# Altium PCB PCB1.PcbDoc
Units mm, origin at the board's own origin, x right, y up, seen from the top; angles counter-clockwise.
Board outline 168.4 x 154.15 mm, 2 copper layers (Top Layer, Bottom Layer); 101 components, 128 nets, 486 pads, 0 vias.
Unrouted connection lines stored in the file: 15.
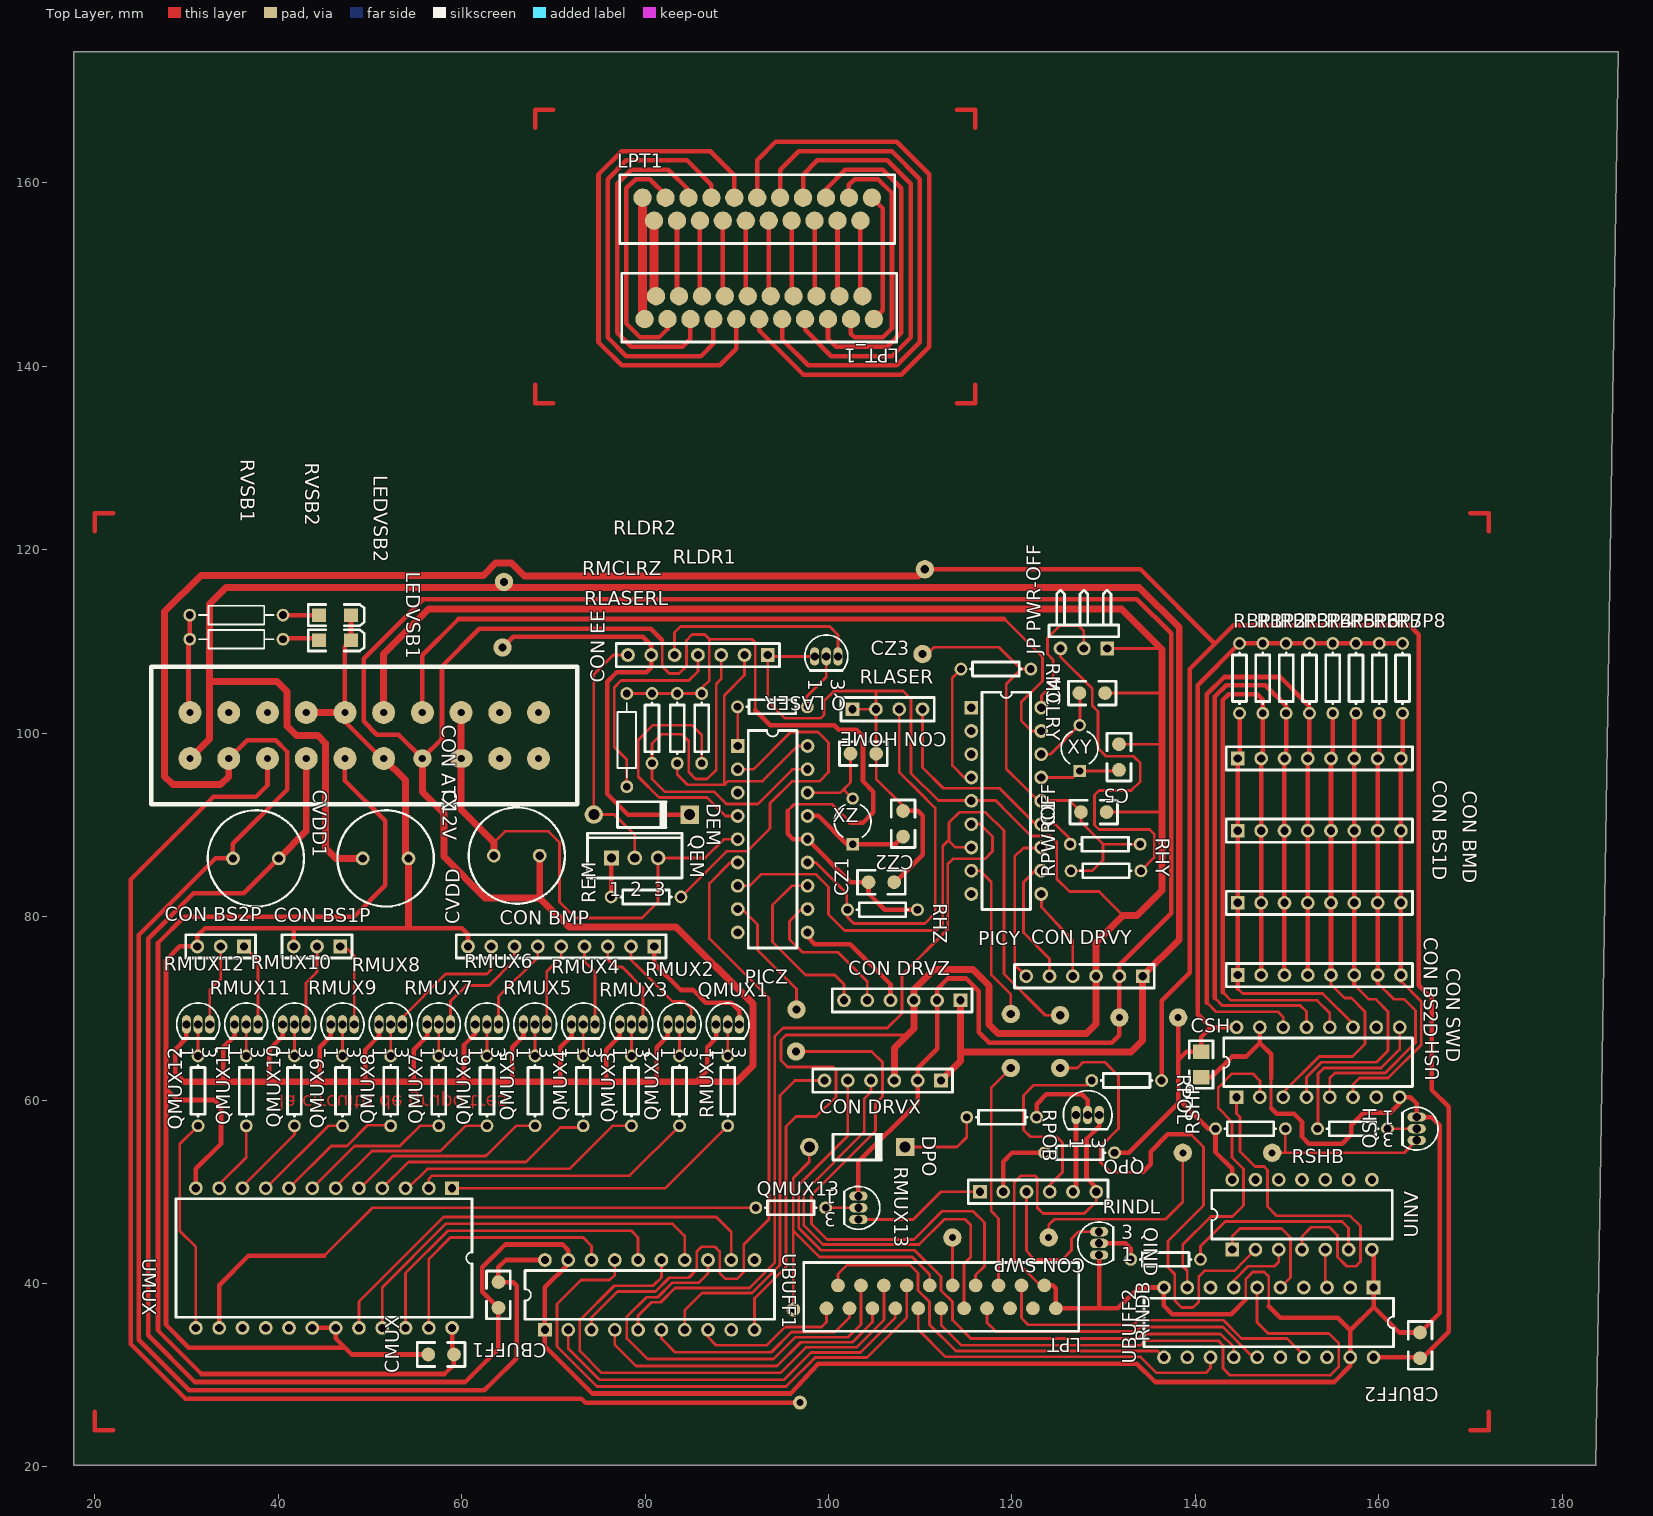
[diagram p0: Top Layer view]
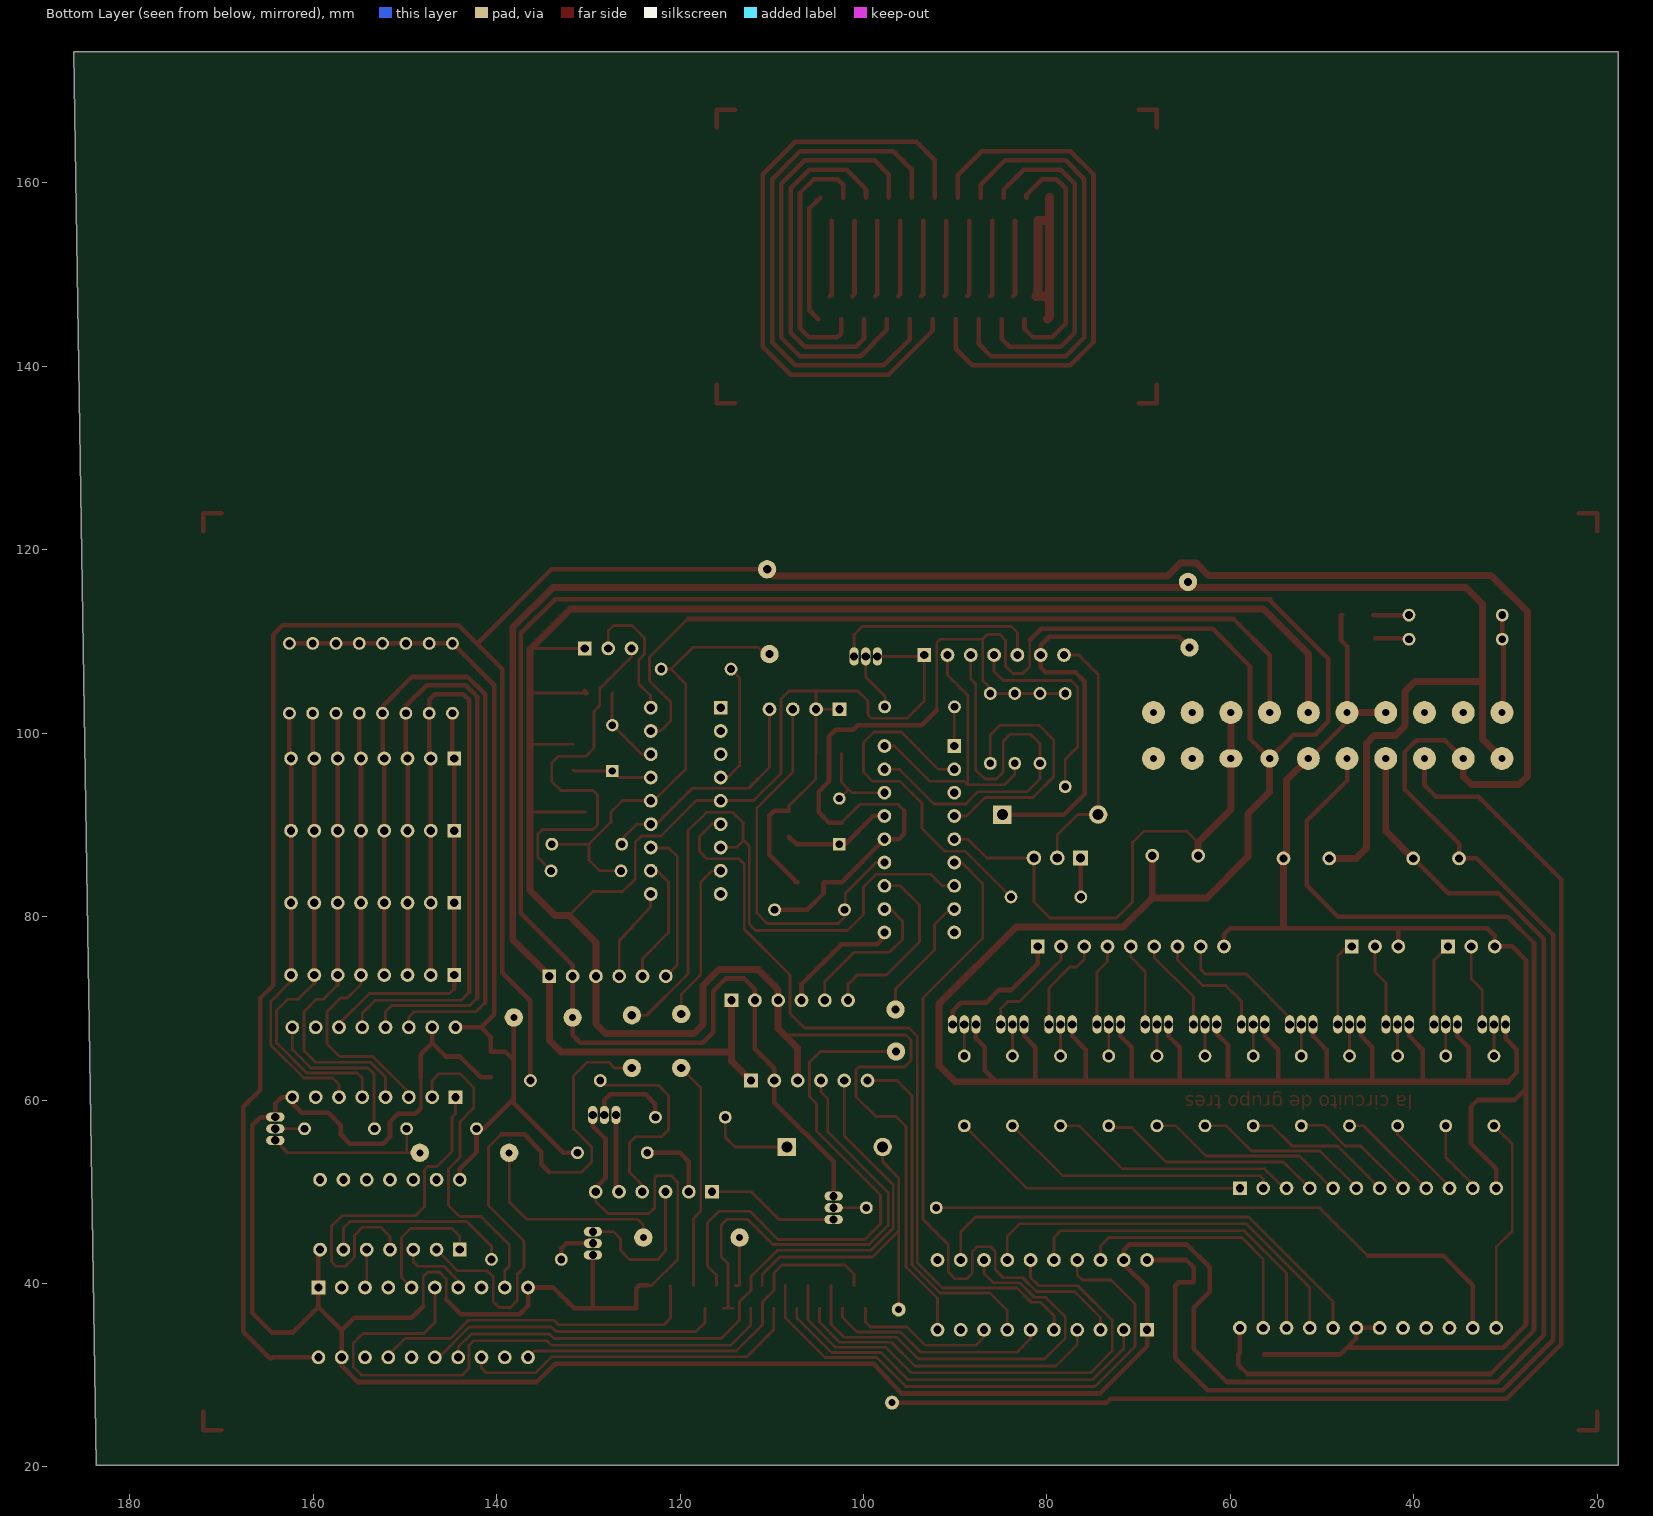
[diagram p1: Bottom Layer view, seen from below]

## Layer stack, top to bottom
Top Layer: signal copper 0.0356
Dielectric: dielectric 0.32, FR-4, Dk 4.8
Bottom Layer: signal copper 0.0356

## Board outline
186.1,174.3 17.7,174.3 17.7,20.15 183.65,20.15

## Design rules (kind name [scope] priority, off if disabled: settings)
Clearance [All] p1: gap=0.254
ComponentClearance [All] p1: gap=0.254 collisioncheckmode=0
PolygonConnect [All] p1: connectstyle=Relief reliefconductorwidth=0.254 reliefentries=4 polygonreliefangle="90 Angle"
RoomDefinition MAIN2 [InComponentClass('MAIN2')] p1: confinementstyle=ConfineIn formatcopy=TRUE outline 0,0 50.8,0 50.8,25.4 0,25.4
RoutingLayers [All] p1: top layer=Any bottom layer="Not Used"
RoutingVias [All] p1: holewidth=0.711 width=1.27 viastyle="Through Hole" minholewidth=0.711 minwidth=1.27 maxholewidth=0.711 maxwidth=1.27
SolderMaskExpansion [All] p1: expansion=0.102
TestPointUsage [All] p1: valid=0 allowmultiple=FALSE
Testpoint [All] p1: side=15 testpointundercomponent=TRUE minsize=1.016 maxsize=2.54 preferedsize=1.524 minholesize=0 maxholesize=1.016 preferedholesize=0.813 testpointgrid=0.025 style=1023 order=1234567890
Width [All] p1: maxlimit=10 minlimit=0.254 preferedwidth=0.254 toplayer_prefwidth=0.5 bottomlayer_maxwidth=0.254 minimp=50.000000 maximp=50.000000 favimp=50.000000
16 further rules are at their usual default settings.

## Components (designator, comment, footprint, x,y, rotation, side; value= is the part's Value field where it differs from the comment)
C1 "" C3216-1206#1 128.915,91.4 r180 top
C4 "XTAL" C3216-1206#1 128.75,104.375 r180 top
C5 "XTAL" C3216-1206#1 131.665,97.4 r270 top
C12V "" RB5-10.5 51.7,86.35 r0 top
CBUFF1 "" C3216-1206#1 64,38.75 r270 top (schematic designator CMUX)
CBUFF2 "" C3216-1206#1 164.5,33.25 r270 top (schematic designator CMUX)
CMUX "" C3216-1206#1 57.75,32.25 r180 top
"CON ATX" "ATX CONNECTOR" ATX 30.375,97.25 r0 top
"CON BMD" "HDR1X8" HDR1X8 144.63,97.25 r0 top
"CON BMP" "HDR1X9" HDR1X9 81,76.75 r180 top
"CON BS1D" "HDR1X8" HDR1X8 144.63,89.375 r0 top
"CON BS1P" "HDR1X3" HDR1X3 46.75,76.75 r180 top
"CON BS2D" "HDR1X8" HDR1X8 144.63,81.5 r0 top
"CON BS2P" "HDR1X3" HDR1X3 36.25,76.75 r180 top
"CON DRVX" "HDR1X6" HDR1X6 112.25,62.125 r180 top
"CON DRVY" "HDR1X6" HDR1X6 134.25,73.5 r180 top
"CON DRVZ" "HDR1X6" HDR1X6 114.375,70.875 r180 top
"CON EE" "HDR1X7" HDR1X7 93.37,108.525 r180 top
"CON HOME" "HDR1X4" HDR1X4 102.62,102.615 r0 top
"CON SWD" "HDR1X8" HDR1X8 144.63,73.625 r0 top
"CON SWP" "HDR1X6" HDR1X6 116.5,50 r0 top
CSH "" C3216-1206#2 140.63,63.875 r90 top
CVDD "" RB5-10.5 66,86.65 r180 top
CVDD1 "" RB5-10.5 37.55,86.35 r0 top (schematic designator CVDD)
CZ1 "" C3216-1206#1 105.75,83.75 r180 top
CZ2 "XTAL" C3216-1206#1 108.125,90.125 r270 top
CZ3 "XTAL" C3216-1206#1 103.79,97.775 r180 top
DEM "1N4001" DIO10.46-5.3x2.8 79.625,91.125 r0 top
DPO "1N4001" DIO10.46-5.3x2.8 103.125,54.875 r0 top
"JP PWR-OFF" "AUTO PWR-OFF" HDR1X3H 130.375,109.25 r180 top
LEDVSB1 "" DSO-F2/D6.1 46.175,112.875 r0 top
LEDVSB2 "" DSO-F2/D6.1 46.175,110.125 r0 top
LPT "Connector 36" PCBComponent_1#1 109.78,37.286 r180 top
LPT1 "Connector 36" PCBComponent_1#2 94.72,158.394 r0 top
LPT_1 "Connector 36" PCBComponent_1#2 89.938,145.154 r180 top
PICY "PIC16C84-04/P" DIP-18 119.375,92.625 r270 top
PICZ "PIC16C84-04/P" DIP-18 93.902,88.439 r270 top
"Q LASER" "2N3904" BCY-W3/D4.7 99.75,108.375 r270 top
QEM "TIP122" SFM-T3/X1.6V 78.87,86.4 r0 top
QIND "2N3904" BCY-W3/D4.7 129.5,44.375 r0 top
QMUX1 "2N3906" BCY-W3/D4.7 89,68.25 r270 top
QMUX2 "2N3906" BCY-W3/D4.7 83.75,68.25 r270 top
QMUX3 "2N3906" BCY-W3/D4.7 78.5,68.25 r270 top
QMUX4 "2N3906" BCY-W3/D4.7 73.25,68.25 r270 top
QMUX5 "2N3906" BCY-W3/D4.7 68,68.25 r270 top
QMUX6 "2N3906" BCY-W3/D4.7 62.75,68.25 r270 top
QMUX7 "2N3906" BCY-W3/D4.7 57.5,68.25 r270 top
QMUX8 "2N3906" BCY-W3/D4.7 52.25,68.25 r270 top
QMUX9 "2N3906" BCY-W3/D4.7 47,68.25 r270 top
QMUX10 "2N3906" BCY-W3/D4.7 41.75,68.25 r270 top
QMUX11 "2N3906" BCY-W3/D4.7 36.5,68.25 r270 top
QMUX12 "2N3906" BCY-W3/D4.7 31.25,68.25 r270 top
QMUX13 "2N3906" BCY-W3/D4.7 103.25,48.25 r180 top
QPO "2N3904" BCY-W3 128.25,58.375 r270 top
QSH "2N3904" BCY-W3/D4.7 164.13,56.875 r180 top
RBP1 "Res1" AXIAL-0.3 144.814,105.985 r90 top
RBP2 "Res1" AXIAL-0.3 147.354,105.985 r90 top
RBP3 "Res1" AXIAL-0.3 149.894,105.985 r90 top
RBP4 "Res1" AXIAL-0.3 152.434,105.985 r90 top
RBP5 "Res1" AXIAL-0.3 154.974,105.985 r90 top
RBP6 "Res1" AXIAL-0.3 157.514,105.985 r90 top
RBP7 "Res1" AXIAL-0.3 160.054,105.985 r90 top
RBP8 "Res1" AXIAL-0.3 162.594,105.985 r90 top
REM "" AXIAL-0.3 80.1,82.15 r180 top
RHY "" AXIAL-0.3 130.165,87.9 r0 top
RHZ "" AXIAL-0.3 105.875,80.75 r0 top
RINDB "" AXIAL-0.3 136.75,42.625 r180 top
RINDL "" AXIAL-0.3 127.375,54.25 r0 top
RLASER "" AXIAL-0.3 93.875,102.875 r0 top
RLASERL "" AXIAL-0.4 78,99.25 r90 top
RLDR1 "" AXIAL-0.3 83.495,100.525 r90 top
RLDR2 "" AXIAL-0.3 80.745,100.525 r90 top
RMCLRY "" AXIAL-0.3 118.245,106.99 r0 top
RMCLRZ "" AXIAL-0.3 86.165,100.525 r90 top
RMUX1 "" AXIAL-0.3 89,61 r90 top
RMUX2 "" AXIAL-0.3 83.75,61 r90 top
RMUX3 "" AXIAL-0.3 78.5,61 r90 top
RMUX4 "" AXIAL-0.3 73.25,61 r90 top
RMUX5 "" AXIAL-0.3 68,61 r90 top
RMUX6 "" AXIAL-0.3 62.75,61 r90 top
RMUX7 "" AXIAL-0.3 57.5,61 r90 top
RMUX8 "" AXIAL-0.3 52.25,61 r90 top
RMUX9 "" AXIAL-0.3 47,61 r90 top
RMUX10 "" AXIAL-0.3 41.75,61 r90 top
RMUX11 "" AXIAL-0.3 36.5,61 r90 top
RMUX12 "" AXIAL-0.3 31.25,61 r90 top
RMUX13 "" AXIAL-0.3 95.875,48.25 r0 top
RPOB "" AXIAL-0.3 118.875,58.125 r0 top
RPOL "" AXIAL-0.3 132.5,62.125 r0 top
RPWROFF "" AXIAL-0.3 130.245,84.99 r180 top
RSHB "" AXIAL-0.3 157.13,56.875 r180 top
RSHP "" AXIAL-0.3 146,56.875 r180 top
RVSB1 "" AXIAL-0.4 35.425,112.875 r0 top
RVSB2 "" AXIAL-0.4 35.425,110.25 r0 top
UBUFF1 "SN74LS244N" DIP-20/E5.3 80.5,38.75 r0 top
UBUFF2 "SN74LS244N" DIP-20/E5.3 148,35.75 r180 top
UINV "SN74LS04N" DIP-14/D19.7 151.625,47.5 r0 top
UMUX "DM74LS154N" DIP-24/D32.3 44.978,42.774 r180 top
USH "DM74LS165J" DIP-16 153.38,64.125 r0 top
XY "11.059MHz" CAPR5-4X5 127.375,95.875 r90 top
XZ "11.059MHz" CAPR5-4X5 102.625,87.875 r90 top

## Footprints (in the part's own frame and the unit in brackets; to place one, negate y for a bottom-side part, rotate by r counter-clockwise, add the part's x,y. Pads: shape width x height; smd on the part's side, far side on the other; paste and mask are expansions set on the pad)
ATX [mm]
  round 2.5 hole 0.8: 1(38,0) 2(33.778,0) 5(21.111,0) 6(16.889,0) 7(12.667,0) 8(8.444,0) 9(4.222,0) 10(0,0) 11(38,5) 12(33.778,5) 13(29.555,5) 14(25.333,5) 15(21.111,5) 16(16.889,5) 17(12.667,5) 18(8.444,5) 19(4.222,5) 20(0,5)
  oval 2.5x2 hole 0.8: 3(29.555,0)
  round 2 hole 0.8: 4(25.333,0)
  silkscreen extent -4.22,-5 42.22,10
AXIAL-0.3 [mm]
  round 1.4 hole 0.85: 1(-3.81,0) 2(3.81,0)
  silkscreen extent -2.77,-0.76 2.77,0.76
AXIAL-0.4 [mm]
  round 1.4 hole 0.85: 1(-5.08,0) 2(5.08,0)
  silkscreen extent -4.06,-1.02 4.06,1.02
BCY-W3 [mm]
  oval 2x1 hole 0.9: 1(0,-1.27) 2(0,0) 3(0,1.27)
  silkscreen extent -2.65,-2.65 1.55,2.65
BCY-W3/D4.7 [mm]
  oval 2x1 hole 0.9: 1(0,-1.27) 2(0,0) 3(0,1.27)
  silkscreen extent -2.33,-2.33 1.55,2.33
C3216-1206#1 [mm]
  round 1.5 smd: 1(-1.4,0) 2(1.4,0)
  silkscreen extent -2.6,-1.3 2.6,1.3
C3216-1206#2 [mm]
  rect 1.6x1.8 smd: 1(-1.4,0) 2(1.4,0)
  silkscreen extent -2.6,-1.3 2.6,1.3
CAPR5-4X5 [mm]
  rect 1.35x1.35 hole 0.8: 1(0,0)
  round 1.35 hole 0.8: 2(5,0)
  silkscreen extent 0.81,-2 4.32,2
DIO10.46-5.3x2.8 [mm]
  round 2 hole 1.2: 1(-5.23,0)
  rect 2x2 hole 1.2: 2(5.23,0)
  silkscreen extent -2.65,-1.4 2.75,1.4
DIP-14/D19.7 [mm]
  rect 1.5x1.5 hole 0.9: 1(-7.62,-3.81)
  round 1.5 hole 0.9: 2(-5.08,-3.81) 3(-2.54,-3.81) 4(0,-3.81) 5(2.54,-3.81) 6(5.08,-3.81) 7(7.62,-3.81) 8(7.62,3.81) 9(5.08,3.81) 10(2.54,3.81) 11(0,3.81) 12(-2.54,3.81) 13(-5.08,3.81) 14(-7.62,3.81)
  silkscreen extent -9.85,-2.65 9.85,2.65
DIP-16 [mm]
  rect 1.5x1.5 hole 0.9: 1(-8.89,-3.81)
  round 1.5 hole 0.9: 2(-6.35,-3.81) 3(-3.81,-3.81) 4(-1.27,-3.81) 5(1.27,-3.81) 6(3.81,-3.81) 7(6.35,-3.81) 8(8.89,-3.81) 9(8.89,3.81) 10(6.35,3.81) 11(3.81,3.81) 12(1.27,3.81) 13(-1.27,3.81) 14(-3.81,3.81) 15(-6.35,3.81) 16(-8.89,3.81)
  silkscreen extent -10.3,-2.65 10.3,2.65
DIP-18 [mm]
  rect 1.5x1.5 hole 0.9: 1(-10.16,-3.81)
  round 1.5 hole 0.9: 2(-7.62,-3.81) 3(-5.08,-3.81) 4(-2.54,-3.81) 5(0,-3.81) 6(2.54,-3.81) 7(5.08,-3.81) 8(7.62,-3.81) 9(10.16,-3.81) 10(10.16,3.81) 11(7.62,3.81) 12(5.08,3.81) 13(2.54,3.81) 14(0,3.81) 15(-2.54,3.81) 16(-5.08,3.81) 17(-7.62,3.81) 18(-10.16,3.81)
  silkscreen extent -11.85,-2.65 11.85,2.65
DIP-20/E5.3 [mm]
  rect 1.5x1.5 hole 0.9: 1(-11.43,-3.81)
  round 1.5 hole 0.9: 2(-8.89,-3.81) 3(-6.35,-3.81) 4(-3.81,-3.81) 5(-1.27,-3.81) 6(1.27,-3.81) 7(3.81,-3.81) 8(6.35,-3.81) 9(8.89,-3.81) 10(11.43,-3.81) 11(11.43,3.81) 12(8.89,3.81) 13(6.35,3.81) 14(3.81,3.81) 15(1.27,3.81) 16(-1.27,3.81) 17(-3.81,3.81) 18(-6.35,3.81) 19(-8.89,3.81) 20(-11.43,3.81)
  silkscreen extent -13.6,-2.65 13.6,2.65
DIP-24/D32.3 [mm]
  rect 1.5x1.5 hole 0.9: 1(-13.97,-7.62)
  round 1.5 hole 0.9: 2(-11.43,-7.62) 3(-8.89,-7.62) 4(-6.35,-7.62) 5(-3.81,-7.62) 6(-1.27,-7.62) 7(1.27,-7.62) 8(3.81,-7.62) 9(6.35,-7.62) 10(8.89,-7.62) 11(11.43,-7.62) 12(13.97,-7.62) 13(13.97,7.62) 14(11.43,7.62) 15(8.89,7.62) 16(6.35,7.62) 17(3.81,7.62) 18(1.27,7.62) 19(-1.27,7.62) 20(-3.81,7.62) 21(-6.35,7.62) 22(-8.89,7.62) 23(-11.43,7.62) 24(-13.97,7.62)
  silkscreen extent -16.15,-6.45 16.15,6.45
DSO-F2/D6.1 [mm]
  rect 1.5x1.5 smd: 1(-1.75,0) 2(1.75,0)
  silkscreen extent -2.9,-1.15 3.2,1.15
HDR1X3 [mm]
  rect 1.5x1.5 hole 0.9: 1(0,0)
  round 1.5 hole 0.9: 2(2.54,0) 3(5.08,0)
  silkscreen extent -1.27,-1.27 6.35,1.27
HDR1X3H [mm]
  rect 1.5x1.5 hole 0.9: 1(0,0)
  round 1.5 hole 0.9: 2(2.54,0) 3(5.08,0)
  silkscreen extent -1.27,-6.35 6.35,-1.27
HDR1X4 [mm]
  rect 1.5x1.5 hole 0.9: 1(0,0)
  round 1.5 hole 0.9: 2(2.54,0) 3(5.08,0) 4(7.62,0)
  silkscreen extent -1.27,-1.27 8.89,1.27
HDR1X6 [mm]
  rect 1.5x1.5 hole 0.9: 1(0,0)
  round 1.5 hole 0.9: 2(2.54,0) 3(5.08,0) 4(7.62,0) 5(10.16,0) 6(12.7,0)
  silkscreen extent -1.27,-1.27 13.97,1.27
HDR1X7 [mm]
  rect 1.5x1.5 hole 0.9: 1(0,0)
  round 1.5 hole 0.9: 2(2.54,0) 3(5.08,0) 4(7.62,0) 5(10.16,0) 6(12.7,0) 7(15.24,0)
  silkscreen extent -1.27,-1.27 16.51,1.27
HDR1X8 [mm]
  rect 1.5x1.5 hole 0.9: 1(0,0)
  round 1.5 hole 0.9: 2(2.54,0) 3(5.08,0) 4(7.62,0) 5(10.16,0) 6(12.7,0) 7(15.24,0) 8(17.78,0)
  silkscreen extent -1.27,-1.27 19.05,1.27
HDR1X9 [mm]
  rect 1.5x1.5 hole 0.9: 1(0,0)
  round 1.5 hole 0.9: 2(2.54,0) 3(5.08,0) 4(7.62,0) 5(10.16,0) 6(12.7,0) 7(15.24,0) 8(17.78,0) 9(20.32,0)
  silkscreen extent -1.27,-1.27 21.59,1.27
PCBComponent_1#1 [mm]
  round 1.5 smd: 1(0,0) 2(2.5,0) 3(5,0) 4(7.5,0) 5(10,0) 6(8.75,-2.5) 7(6.25,-2.5) 8(3.75,-2.5) 9(1.25,-2.5) 10(-1.25,-2.5) 11(-3.75,-2.5) 12(-6.25,-2.5) 13(-8.75,-2.5) 14(-11.25,-2.5) 18(-12.5,0) 30(-13.75,-2.5) 31(-2.5,0) 32(-5,0) 33(-15,0) 35(-10,0) 36(-7.5,0)
  silkscreen extent -17.5,-5 12.5,2.5
PCBComponent_1#2 [mm]
  round 2 smd: 1(0,0) 2(2.5,0) 3(5,0) 4(7.5,0) 5(10,0) 6(8.75,-2.5) 7(6.25,-2.5) 8(3.75,-2.5) 9(1.25,-2.5) 10(-1.25,-2.5) 11(-3.75,-2.5) 12(-6.25,-2.5) 13(-8.75,-2.5) 14(-11.25,-2.5) 18(-12.5,0) 30(-13.75,-2.5) 31(-2.5,0) 32(-5,0) 33(-15,0) 35(-10,0) 36(-7.5,0)
  silkscreen extent -17.5,-5 12.5,2.5
RB5-10.5 [mm]
  round 1.5 hole 0.9: 1(-2.5,0) 2(2.5,0)
  silkscreen extent -5.25,-5.25 5.25,5.25
SFM-T3/X1.6V [mm]
  rect 1.6x1.6 hole 1: 1(-2.54,0)
  round 1.6 hole 1: 2(0,0) 3(2.54,0)
  silkscreen extent -5.15,-2.2 5.15,2.7

## Part data
C1 CBUFF1 CBUFF2 CMUX CZ1: library part Cap, "Capacitor"
C4 C5 CZ2 CZ3: library part cap, "Capacitor"
C12V CVDD CVDD1: library part "Cap Pol1", "Polarized Capacitor (Radial)"
"CON ATX": library part "Header 10X2A", "Header, 10-Pin, Dual row"
"CON BMD" "CON BS1D" "CON BS2D" "CON SWD": library part MHDR1X8, "Header, 8-Pin"
"CON BMP": library part MHDR1X9, "Header, 9-Pin"
"CON BS1P" "CON BS2P": library part MHDR1X3, "Header, 3-Pin"
"CON DRVX" "CON DRVY" "CON DRVZ" "CON SWP": library part MHDR1X6, "Header, 6-Pin"
"CON EE": library part MHDR1X7, "Header, 7-Pin"
"CON HOME": library part MHDR1X4, "Header, 4-Pin"
CSH: library part "Cap Semi", "Capacitor (Semiconductor SIM Model)"
DEM DPO: "1.0 Ampere General Purpose Rectifier"
"JP PWR-OFF": library part "Header 3H", "Header, 3-Pin,  Right Angle"
LEDVSB1 LEDVSB2: library part LED2, "Typical RED, GREEN, YELLOW, AMBER GaAs LED"
PICY PICZ: "EPROM-Based 8-Bit CMOS Microcontroller"
"Q LASER" QIND QSH: "NPN General Purpose Amplifier"
QEM: library part MJE15030, "Complementary Silicon Plastic Power Transistor"
QMUX1 QMUX2 QMUX3 QMUX4 QMUX5 QMUX6 QMUX7 QMUX8 QMUX9 QMUX10 QMUX11 QMUX12 QMUX13: "PNP General Purpose Amplifier"
QPO: library part NPN, "NPN Bipolar Transistor"
RBP1 RBP2 RBP3 RBP4 RBP5 RBP6 RBP7 RBP8: "Resistor"
REM RHY RHZ RINDB RINDL RLASER RLASERL RLDR1 RLDR2 RMCLRY RMCLRZ RMUX1 RMUX2 RMUX3 RMUX4 RMUX5 RMUX6 RMUX7 RMUX8 RMUX9 RMUX10 RMUX11 RMUX12 RMUX13 RPOB RPOL RPWROFF RSHB RSHP RVSB1 RVSB2: library part Res1, "Resistor"
UBUFF1 UBUFF2: "Octal Buffer/Line Driver with 3-State Outputs"
UINV: "Hex Inverter"
UMUX: "4-Line to 16-Line Decoder/Demultiplexer"
USH: "8-Bit Parallel In/Serial Output Shift Register"
XY XZ: library part XTAL, "Crystal Oscillator"

## Free pads (board coordinates)
  round 2 hole 0.9: 0(64.45,109.35) 1(64.6,116.5) 4(110.5,117.875) 5(110.25,108.625) 10(96.5,69.875) 11(96.45,65.3) 12(119.875,69.375) 13(125.25,69.25) 14(119.875,63.5) 15(125.25,63.5)
  round 2 hole 0.762: 0(138.125,69) 0(148.375,54.25) 1(131.71,69) 3(138.625,54.25) 12(113.5,45) 13(124,45)
  round 1.524 hole 0.762: 1(96.154,37.154) 2(96.875,27)

## Nets (pads, with @x,y where several pads share a name; then routed paths per layer and width w, separated by ;. In a path a pad name is that pad's centre, name@x,y a point inside that pad or via, vN(x,y) a via of type N, cw(c..) or ccw(c..) an arc to the next point about the centre after c; other vN are vias at no path point)
+12V: "CON ATX.10" "CON DRVX.1" "CON DRVY.1" "CON DRVZ.1" "CON EE.6" C12V.1 DEM.2 pad.0@64.45,109.35 pad.1@64.6,116.5 | length 284.1
  Top Layer w0.3: 134.25,73.375 134.274,73.38 134.875,73.5
  Top Layer w0.5: pad.0@64.45,109.35 65.6,110.5 79.75,110.5 80.67,109.58 80.67,107.17 80.125,106.625 76.875,106.625 75.875,105.625 75.875,93.375 78.125,91.125 DEM.2
  Top Layer w0.75: 30.375,97.25 32.5,99.375 32.5,114.1 34.275,115.875 133.875,115.875 138.242,111.508 138.242,77.492 134.25,73.5 134.25,73.375 134.25,69.25 134.25,66.5 133,65.25 114.375,65.25 ; 30.5,96.95 30.5,97.125 ; 32.6,105.65 39.85,105.65 40.95,104.55 40.95,100.8 42,99.75 44.3,99.75 45.15,98.9 45.15,87.5 46.3,86.35 C12V.1 ; 112.25,62.125 114.375,64.25 114.375,70.875
BCLK: UBUFF2.9 USH.2 | length 34.5
  Top Layer w0.3: UBUFF2.9 139.11,41.39 138.625,41.875 138.625,44.25 141.679,47.304 144.054,47.304 145.25,48.5 145.25,52.5 144,53.75 144,57.625 142.5,59.125 142.5,61.375 144,62.875 146.25,62.875 147.03,62.095 USH.2
COILY: "CON DRVY.6" PICY.12 | length 16.9
  Top Layer w0.3: 121.55,73.5 120.295,74.755 120.295,86.54 121.245,87.49 123.145,87.49 PICY.12@123.225,87.57
COILZ: "CON DRVZ.6" PICZ.12 | length 20.6
  Top Layer w0.3: PICZ.12@97.712,82.957 PICZ.12 95.984,83.359 93.875,81.25 93.875,77.25 97.5,73.625 100.675,73.625 101.675,72.625 101.675,70.875
GND: "CON ATX.3" "CON ATX.5" "CON ATX.7" "CON ATX.13" "CON ATX.15" "CON ATX.16" "CON ATX.17" "CON BMP.9" "CON BS1P.3" "CON BS2P.3" "CON DRVX.3" "CON DRVY.3" "CON DRVZ.3" "CON EE.1" "CON HOME.1" "CON HOME.2" "CON SWP.6" "JP PWR-OFF.1" "Q LASER.1" C1.1 C4.1 C5.1 C12V.2 CBUFF1.2 CBUFF2.1 CMUX.2 CSH.1 CVDD1.2 CVDD.2 CZ1.1 CZ2.1 CZ3.1 LEDVSB1.2 LEDVSB2.2 LPT.30 LPT.33 PICY.5 PICZ.5 QEM.3 QIND.1 QPO.3 QSH.1 UBUFF1.1 UBUFF1.10 UBUFF1.19 UBUFF2.1 UBUFF2.10 UBUFF2.19 UINV.7 UMUX.12 UMUX.18 UMUX.19 USH.8 USH.15 | length 1000.5
  Top Layer w0.3: 31.17,76.75 31.17,77.42 ; 63.5,88.1 64.7,89.3 69.45,89.3 70.65,88.1 70.65,81.6 72.4,79.85 79.65,79.85 81.41,81.61 QEM.3 86.54,86.4 88.579,88.439 PICZ.5 PICZ.5@89.928,88.275 ; UBUFF1.10 91.93,38.38 95.35,41.8 95.35,57.1 96.45,58.2 98.65,58.2 100.8,60.35 100.8,63.3 100.5,63.6 95.5,63.6 94.8,64.3 94.8,66.55 95.35,67.1 108.7,67.1 ; 98.48,108.375 93.52,108.375 93.37,108.525 93.37,103.505 95.25,101.625 99.125,101.625 99.5,102 99.5,103.5 100.615,104.615 108.135,104.615 109,103.75 109,95.625 111.975,92.65 118.225,92.65 119.75,91.125 122.075,88.8 124.2,88.8 124.875,88.125 124.875,84.125 126.26,82.74 129.51,82.74 132.125,80.125 ; 102.62,102.615 105.16,102.615 ; 105.16,104.555 105.16,97.805 CZ3.1 105.19,95.025 108.125,92.09 CZ2.1 ; LPT.30 123.089,39.786 120.25,42.625 120.25,51 121,51.75 122.5,51.75 122.75,51.5 122.75,48.25 123.375,47.625 127.875,47.625 129.2,48.95 129.2,50 ; C1.1 136.375,91.4 ; C4.1@130.315,104.21 C4.1 136.359,104.375 ; 130.375,109.25 136.266,109.25 ; C5.1 136.375,98.8 ; 145.5,38.25 145.5,40.5 146.25,41.25 147.5,41.25 148,40.75 148,37.5 ; 148.25,59.125 148.25,62.375 ; UBUFF2.1@159.12,39.87 UBUFF2.1
  Top Layer w0.5: 27.75,61.25 29,60 33,60 33.75,59.25 33.75,55.25 31.008,52.508 UMUX.12 ; CVDD1.2 36.25,82.55 30.75,82.55 25.8,77.6 25.8,34.35 30.9,29.25 60.4,29.25 64,32.85 CBUFF1.2 62.25,39.1 62.25,41.75 64.75,44.25 71,44.25 71.61,43.64 71.61,42.11 69.07,39.57 69.07,33.18 74.25,28 95.875,28 98.875,31.25 133.625,31.25 135.625,29.25 155.125,29.25 156.89,31.015 156.89,34.89 ; 41.67,76.75 41.67,78.68 ; UMUX.18 UMUX.19 46.248,34.002 48,32.25 CMUX.2 ; 47.25,33 30.25,33 27.75,35.5 27.75,75.25 29.25,76.75 31.17,76.75 31.17,77.92 32,78.75 60,78.75 60.68,78.07 60.68,76.75 ; LEDVSB1.2@47.8,112.875 LEDVSB1.2 LEDVSB2.2 47.264,109.464 47.264,101.236 51.25,97.25 ; CZ1.1 CZ1.1@107.375,83.75 ; CZ1.1@107.25,83.75 110.25,86.75 110.25,91 109.725,91.525 CZ2.1 ; LPT.30 124.464,39.786 124.78,39.47 LPT.33 131.536,37.286 133.81,39.56 UBUFF2.10 136.57,37.555 137.471,36.654 143.904,36.654 145.5,38.25 ; 129.2,50 129.2,50.425 128.125,51.5 128.125,55.75 129.52,57.145 QPO.3 ; 129.5,37.411 QIND.1 ; C4.1 C4.1@130.375,104.6 ; CSH.1 141.725,62.475 144,64.75 145.56,64.75 147.03,66.22 ; USH.15 147.03,66.22 ; 148,37.5 149.25,36.25 155.53,36.25 156.89,34.89 ; 148.25,59.125 148.875,58.5 150.75,58.5 151.625,57.625 151.625,56 152.375,55.25 156,55.25 157,56.25 157,57.25 158.375,58.625 161.25,58.625 162.27,59.645 USH.8 163.435,60.315 164.13,59.62 QSH.1 165.73,58.145 166.625,57.25 166.625,36.775 CBUFF2.1 162.21,34.65 159.43,37.43 ; 148.25,62.375 148.25,65 147.03,66.22 ; UINV.7 159.43,43.505 159.43,37.43 ; 156.89,34.89 159.43,37.43
  Top Layer w0.75: CVDD1.2 43.042,89.342 43.042,97.25 ; 43.042,102.25 47.264,102.25 ; 51.486,97.25 53.85,94.886 53.85,86.7 C12V.2 54.2,78.85 ; 51.486,102.25 51.486,108.636 56.4,113.55 131.966,113.55 136.375,109.141 136.375,82.875 133.625,80.125 132.125,80.125 129.17,77.17 129.17,68.295 128.125,67.25 118.5,67.25 117.5,68.25 117.5,72.5 115.75,74.25 111.5,74.25 109.295,72.045 109.295,67.795 108.875,67.375 108.65,67.15 108.6,67.1 107.17,65.67 107.17,62.42 ; 59.93,102.25 59.93,91.67 63.5,88.1 CVDD.2
"LED IND": UBUFF2.3 UINV.5 | length 4.2
  Top Layer w0.3: UINV.5 154.165,39.745 UBUFF2.3
"MUX INPUT": LPT.11 pad.0@148.375,54.25 pad.3 pad.12@113.5,45 pad.13@124,45 QSH.3 RSHP.1 | length 47
  Top Layer w0.3: pad.12@113.5,45 113.5,39.816 LPT.11 LPT.11@113.964,39.786 ; pad.13@124,45 124,46.375 124.625,47 136.75,47 138.625,48.875 pad.3 ; pad.0@148.375,54.25 162.775,54.25 QSH.3 ; 149.75,54.25 149.81,54.31 RSHP.1
NetC4_2: C4.2 PICY.16 XY.2 | length 9
  Top Layer w0.3: PICY.16 124.205,97.705 XY.2 ; C4.2 127.415,104.31 XY.2@127.415,100.915
NetC5_2: C5.2 PICY.15 XY.1 | length 8.8
  Top Layer w0.3: PICY.15 126.665,95.165 XY.1 131.54,95.875 C5.2
"NetCON ATX_14": "CON ATX.14" PICY.17 | length 87.8
  Top Layer w0.3: 119.175,112.45 123.321,108.304 123.321,105.696 121,103.375 121,101.375 122.13,100.245 PICY.17
  Top Layer w0.5: 55.708,102.25 55.708,108.508 59.65,112.45 119.175,112.45
"NetCON BMD_1": "CON BMD.1" "CON BS1D.1" "CON BS2D.1" "CON SWD.1" RBP1.1 USH.11 | length 44.6
  Top Layer w0.3: 144.63,72.125 145.13,71.625 153.88,71.625 157.19,68.315 USH.11
  Top Layer w0.5: 144.63,72.125 144.63,81.5 144.63,97.25 144.814,97.434 RBP1.1
"NetCON BMD_2": "CON BMD.2" "CON BS1D.2" "CON BS2D.2" "CON SWD.2" RBP2.1 USH.12 | length 81
  Top Layer w0.3: 143,71.75 143.875,70.875 153.255,70.875 154.65,69.48 USH.12
  Top Layer w0.5: 143,71.75 143,103.625 143.625,104.25 146.75,104.25 147.354,103.646 147.354,97.434 147.17,97.25 147.17,81.5 147.17,73.625
"NetCON BMD_3": "CON BMD.3" "CON BS1D.3" "CON BS2D.3" "CON SWD.3" RBP3.1 USH.13 | length 83.8
  Top Layer w0.3: 142.125,71.125 142.929,70.321 151.434,70.321 152.11,69.645 USH.13
  Top Layer w0.5: 142.125,71.125 142.125,104 143.375,105.25 147.625,105.25 149.894,102.981 149.894,97.434 149.71,97.25 149.71,81.5 149.71,73.625
"NetCON BMD_4": "CON BMD.4" "CON BS1D.4" "CON BS2D.4" "CON SWD.4" RBP4.1 USH.14 | length 94.5
  Top Layer w0.3: 141.25,70.625 142.25,69.625 149,69.625 149.57,69.055 USH.14
  Top Layer w0.5: 141.25,70.625 141.25,104.25 143.125,106.125 149.25,106.125 152.434,102.941 152.434,97.434 152.25,97.25 152.25,89.375 152.25,73.625 152.25,81.75
"NetCON BMD_5": "CON BMD.5" "CON BS1D.5" "CON BS2D.5" "CON SWD.5" RBP5.1 USH.3 | length 49.8
  Top Layer w0.3: USH.3 149.57,60.815 153.505,64.75 157.13,64.75 158.5,66.12 158.5,69.63 157.005,71.125 156.255,71.125 154.79,72.59 154.79,73.625 154.575,73.84
  Top Layer w0.5: 154.79,73.625 154.79,97.25 ; 154.974,97.434 RBP5.1
"NetCON BMD_6": "CON BMD.6" "CON BS1D.6" "CON BS2D.6" "CON SWD.6" RBP6.1 USH.4 | length 60
  Top Layer w0.3: USH.4 152.11,62.48 153.755,64.125 159.755,64.125 161.005,65.375 161.005,69.625 159.63,71 158.88,71 157.33,72.55
  Top Layer w0.5: 157.33,81.705 157.33,72.55 157.33,89.375 RBP6.1@157.33,101.991
"NetCON BMD_7": "CON BMD.7" "CON BS1D.7" "CON BS2D.7" "CON SWD.7" RBP7.1 USH.5 | length 51.4
  Top Layer w0.3: USH.5 154.65,62.395 155.201,62.946 160.701,62.946 163.63,65.875 164,66.245 164,69.75 162.75,71 161.63,71 159.87,72.76
  Top Layer w0.5: 159.87,72.76 159.87,81.5 159.87,97.25 160.054,97.434 RBP7.1
"NetCON BMD_8": "CON BMD.8" "CON BS1D.8" "CON BS2D.8" "CON SWD.8" RBP8.1 USH.6 | length 47.8
  Top Layer w0.3: USH.6 157.19,61.685 157.897,62.392 161.022,62.392 164.625,65.995 164.625,70.75 162.41,72.965
  Top Layer w0.5: 162.41,72.965 162.41,81.5 162.41,97.25 162.594,97.434 RBP8.1
"NetCON BMP_1": "CON BMP.1" QMUX1.3 | length 14.8
  Top Layer w0.5: 81,76.75 81,74.875 83.875,72 85.25,72 86.625,70.625 89.375,70.625 90.27,69.73 QMUX1.3
"NetCON BMP_2": "CON BMP.2" QMUX2.3 | length 11.9
  Top Layer w0.3: 78.46,76.75 78.46,75.29 79.25,74.5 83,70.75 84.25,70.75 85.02,69.98 QMUX2.3
"NetCON BMP_3": "CON BMP.3" QMUX3.3 | length 10.5
  Top Layer w0.3: 75.92,76.75 75.92,75.33 76.75,74.5 77.5,74.5 79.77,72.23 QMUX3.3
"NetCON BMP_4": "CON BMP.4" QMUX4.3 | length 9
  Top Layer w0.3: 73.38,76.75 73.38,75.12 74.52,73.98 QMUX4.3
"NetCON BMP_5": "CON BMP.5" QMUX5.3 | length 9.2
  Top Layer w0.3: QMUX5.3 69.27,74.02 70.84,75.59 70.84,76.75
"NetCON BMP_6": "CON BMP.6" QMUX6.3 | length 10.3
  Top Layer w0.3: QMUX6.3 64.02,71.27 68.3,75.55 68.3,76.75
"NetCON BMP_7": "CON BMP.7" QMUX7.3 | length 12.9
  Top Layer w0.3: QMUX7.3 58.77,70.77 60.5,72.5 63,72.5 65.76,75.26 65.76,76.75
"NetCON BMP_8": "CON BMP.8" QMUX8.3 | length 15.2
  Top Layer w0.3: QMUX8.3 53.52,69.02 58.25,73.75 62.75,73.75 63.22,74.22 63.22,76.75
"NetCON BS1P_1": "CON BS1P.1" QMUX9.3 | length 9.4
  Top Layer w0.3: 46.75,76.75 47.25,76.75 48.27,75.73 QMUX9.3
"NetCON BS1P_2": "CON BS1P.2" QMUX10.3 | length 9
  Top Layer w0.3: QMUX10.3 43.02,72.77 44.21,73.96 44.21,76.75
"NetCON BS2P_1": "CON BS2P.1" QMUX11.3 | length 9.1
  Top Layer w0.3: 36.25,76.75 37.77,75.23 QMUX11.3
"NetCON BS2P_2": "CON BS2P.2" QMUX12.3 | length 9
  Top Layer w0.3: QMUX12.3 32.52,72.02 33.71,73.21 33.71,76.75
"NetCON EE_2": "CON EE.2" PICZ.18 RLDR1.1 | length 32.8
  Top Layer w0.3: RLDR1.1 83.495,95.505 84.625,94.375 88.625,94.375 ; 90.87,108.565 90.83,108.525 90.83,106.33 88.625,104.125 88.625,94.375 ; PICZ.18 96.614,98.599 92.79,94.775 89.025,94.775 88.625,94.375
"NetCON EE_3": "CON EE.3" PICZ.17 RLDR2.1 | length 48.4
  Top Layer w0.3: 88.12,108.695 88.29,108.525 88.29,105.915 87.75,105.375 87.75,96 86.75,95 85.5,95 84.75,95.75 84.75,99.125 84,99.875 81.75,99.875 80.745,98.87 80.745,95.005 82.125,93.625 87.5,93.625 88.85,92.275 92.29,92.275 96.074,96.059 PICZ.17
"NetCON EE_4": "CON EE.4" RLASERL.1 | length 23.6
  Top Layer w0.3: RLASERL.1 77.995,94.175 77.995,97.13 76.625,98.5 76.625,105 77.375,105.75 84.75,105.75 85.75,106.75 85.75,108.525 85.37,108.905
"NetCON EE_5": "CON EE.5" "Q LASER.3" | length 23.2
  Top Layer w0.3: 83.21,108.525 83.21,110.96 83.875,111.625 100.125,111.625 101.02,110.73 101.02,108.375
"NetCON EE_7": "CON EE.7" DEM.1 QEM.2 | length 27.6
  Top Layer w0.3: DEM.1@74.39,91.65 74.39,106.39 76.525,108.525 78.13,108.525 77.89,108.285 ; DEM.1 76.625,91.125 78.87,88.88 QEM.2
"NetCON HOME_3": "CON HOME.3" PICZ.13 RHZ.1 | length 42.3
  Top Layer w0.3: PICZ.13 98.606,85.899 101.98,82.525 RHZ.1@101.98,80.835 ; RHZ.1 102.065,79.935 102.75,79.25 110.5,79.25 111.625,80.375 111.625,91.86 109.87,93.615 107.7,95.785 107.7,102.615
"NetCON HOME_4": "CON HOME.4" PICY.13 RHY.1 | length 26.3
  Top Layer w0.3: 110.24,102.615 110.24,96.26 112.5,94 118.625,94 122.54,90.085 124.68,90.085 124.705,90.11 126.355,88.46 RHY.1
"NetCON SWP_1": "CON SWP.1" QMUX13.3 | length 14.5
  Top Layer w0.3: QMUX13.3 109.23,46.98 112.25,50 116.5,50
"NetCON SWP_2": "CON SWP.2" RINDL.1 | length 8.5
  Top Layer w0.3: 119.04,50 119.25,50.21
  Top Layer w0.5: 119.04,50 119.04,53.29 120,54.25 RINDL.1
"NetCON SWP_3": "CON SWP.3" QIND.3 | length 16.8
  Top Layer w0.3: 121.58,50 121.58,43.58 122.375,42.625 125.5,42.625 126.5,43.625 126.5,44.875 127.27,45.645 QIND.3
"NetCON SWP_4": "CON SWP.4" RPOL.1 | length 23
  Top Layer w0.3: 124.5,50 124.12,50 124.12,50.745 125.5,52.125 125.5,55.375 124.875,56 122,56 121.25,56.75 121.25,60.5 122.375,61.625 128.19,61.625 RPOL.1
"NetCON SWP_5": "CON SWP.5" QPO.1 | length 9.5
  Top Layer w0.3: 126.375,50.285 126.66,50 127.25,50
  Top Layer w0.5: 126.66,50 126.98,50.32 QPO.1
NetCZ2_2: CZ2.2 PICZ.15 XZ.1 | length 12.1
  Top Layer w0.5: PICZ.15 98.896,90.979 102,87.875 107.275,87.875 CZ2.2
NetCZ3_2: CZ3.2 PICZ.16 XZ.2 | length 9.8
  Top Layer w0.3: PICZ.16 101.284,93.519 101.75,93.985 101.757,93.993 102.39,94.625 CZ3.2 ; 101.75,94 101.75,93.75 XZ.2
NetDPO_2: DPO.2 RPOB.1 | length 9.3
  Top Layer w0.3: DPO.2 114,54.875 115.065,55.94 RPOB.1
"NetJP PWR-OFF_2": "JP PWR-OFF.2" PICY.18 | length 15.6
  Top Layer w0.3: PICY.18@123.825,102.81 123.225,102.81 123.225,104.1 124.5,105.375 124.5,108 123.875,108.625 123.875,110.375 125.25,111.75 127.25,111.75 127.835,111.165 127.835,109.25
"NetJP PWR-OFF_3": "JP PWR-OFF.3" RPWROFF.1 | length 40.3
  Top Layer w0.3: 125.295,109.25 125.295,108.33 128.75,104.875 128.75,103 129.375,102.375 129.375,98.375 130.26,97.49 133.245,97.49 133.995,96.74 133.995,94.74 132.995,93.74 129.495,93.74 128.995,93.24 128.995,89.99 129.495,89.49 135.01,89.49 135.5,89 135.5,86.435 RPWROFF.1 RPWROFF.1@134.055,85.05
NetLEDVSB1_1: LEDVSB1.1 RVSB1.2 | length 3.9
  Top Layer w0.5: RVSB1.2@40.485,112.875 LEDVSB1.1
NetLEDVSB2_1: LEDVSB2.1 RVSB2.2 | length 3.7
  Top Layer w0.5: RVSB2.2@40.485,110.375 LEDVSB2.1@44.175,110.375
NetLPT_1: LPT.1 UBUFF2.13 | length 37.5
  Top Layer w0.3: LPT.1 109.78,34.97 112.75,32 134,32 135.75,30.25 141.125,30.25 141.65,30.775 UBUFF2.13
NetLPT_2: LPT.2 UBUFF1.2 | length 42.9
  Top Layer w0.3: UBUFF1.2 71.61,32.89 75,29.5 95.125,29.5 98.105,32.48 103.48,32.48 107.28,36.28 LPT.2
NetLPT_3: LPT.3 UBUFF1.4 | length 34.2
  Top Layer w0.3: UBUFF1.4@76.75,34.88 UBUFF1.4 76.69,33.31 79,31 94.375,31 96.963,33.588 102.588,33.588 104.78,35.78 LPT.3
NetLPT_4: LPT.4 UBUFF1.6 | length 24.7
  Top Layer w0.3: UBUFF1.6 81.77,33.98 83.25,32.5 93.75,32.5 95.946,34.696 100.696,34.696 102.28,36.28 LPT.4
NetLPT_5: LPT.5 UBUFF1.8 | length 16.6
  Top Layer w0.3: UBUFF1.8 86.85,34.15 87.75,33.25 93.25,33.25 95.25,35.25 99.25,35.25 99.78,35.78 LPT.5
NetLPT_6: LPT.6 UBUFF2.11 | length 43.9
  Top Layer w0.3: LPT.6 101.03,41.03 102,42 108.875,42 109.75,41.125 109.75,39.25 111,38 111,35.5 113.875,32.625 135.885,32.625 UBUFF2.11
NetLPT_7: LPT.7 UBUFF1.13 | length 46.9
  Top Layer w0.3: UBUFF1.13 86.85,41.1 85.821,40.071 82.946,40.071 81.375,38.5 80.125,38.5 78,36.375 78,34 80.25,31.75 94,31.75 96.392,34.142 102.142,34.142 103.53,35.53 LPT.7
NetLPT_8: LPT.8 UBUFF1.15 | length 56.4
  Top Layer w0.3: UBUFF1.15 81.77,40.645 80.875,39.75 76.625,39.75 72.875,36 72.875,32.625 75.25,30.25 94.75,30.25 97.534,33.034 103.034,33.034 106.03,36.03 LPT.8
NetLPT_9: LPT.9 UBUFF1.17 | length 60.5
  Top Layer w0.3: UBUFF1.17 76.69,40.94 76.125,40.375 73,40.375 70.375,37.75 70.375,33.125 74.75,28.75 95.375,28.75 98.551,31.926 104.176,31.926 108.53,36.28 LPT.9
NetLPT_14: LPT.14 UBUFF2.17 | length 36.7
  Top Layer w0.3: LPT.14 121.03,36.22 121.75,35.5 133.25,35.5 133.75,36 143.033,36 145.033,34 150,34 151.81,32.19 UBUFF2.17
NetLPT_31: LPT.31 UBUFF2.6 | length 66.2
  Top Layer w0.3: LPT.31 112.28,35.47 114.5,33.25 134,33.25 134.5,33.75 142.5,33.75 143,33.25 143,30.75 143.75,30 154.75,30 155.625,30.875 155.625,33.5 154.571,34.554 147.946,34.554 146.73,35.77 UBUFF2.6 UBUFF2.6@146.5,39.33
NetLPT_36: LPT.36 UBUFF2.15 | length 33.5
  Top Layer w0.3: LPT.36 117.28,35.72 118.25,34.75 133.5,34.75 134,35.25 143,35.25 146.31,31.94 UBUFF2.15 ; UBUFF2.15@146.5,31.75 UBUFF2.15@147,31.75
NetPICY_4: PICY.4 RMCLRY.1 | length 13.7
  Top Layer w0.3: RMCLRY.1 113.495,106.05 113.495,96.49 114.795,95.19 115.605,95.19 PICY.4@115.455,95.34
NetPICY_7: pad.13@125.25,69.25 pad.15 PICY.7 PICZ.7 UINV.2 | length 136.8
  Top Layer w0.3: PICZ.7 91.364,83.359 92.62,84.615 98.62,84.615 100,83.235 100,80.25 101.75,78.5 111.75,78.5 112.446,79.196 112.446,87.696 113,88.25 113.125,88.25 ; PICY.7@115.605,87.57 113.805,87.57 113.125,88.25 ; pad.15 127.125,63.5 127.75,64.125 130.125,64.125 131.625,62.625 131.625,56.875 129.625,54.875 129.625,53.25 130.75,52.125 134.25,52.125 ; pad.13@125.25,69.25 123.625,69.25 119.125,73.75 119.125,89.375 117.125,91.375 114.25,91.375 113.125,90.25 113.125,88.25 ; 139.5,56.25 140.875,54.875 140.875,48.5 137,44.625 137,41.75 137.75,41 137.75,38.125 138.5,37.375 139.75,37.375 140.375,38 140.375,40.75 141,41.375 144.25,41.375 145.304,42.429 145.304,42.449 UINV.2
  Top Layer w0.5: 134.25,52.125 135.125,53 135.125,54.375 137,56.25 139.5,56.25
NetPICZ_1: PICZ.1 RLASER.1 | length 4.4
  Top Layer w0.3: PICZ.1@90.018,98.525 PICZ.1 90.092,102.848 RLASER.1
NetPICZ_2: PICZ.2 REM.1 | length 38.6
  Top Layer w0.3: REM.1 88.865,87.105 88.865,87.115 91.12,87.115 93.62,89.615 93.62,92.365 96.005,94.75 99,94.75 100,95.75 100,98.985 98.86,100.125 95.875,100.125 91.809,96.059 PICZ.2
NetPICZ_4: PICZ.4 RMCLRZ.1 | length 27.7
  Top Layer w0.3: RMCLRZ.1 86.165,99.835 85.125,100.875 80.875,100.875 79.25,99.25 79.25,95.25 81.5,93 86.75,93 88.771,90.979 PICZ.4
"NetQ LASER_2": "Q LASER.2" RLASER.2 | length 6.4
  Top Layer w0.3: RLASER.2 97.625,102.935 97.625,104 99.75,106.125 99.75,108.375
NetQEM_1: QEM.1 REM.2 | length 4.2
  Top Layer w0.3: QEM.1@76.31,86.38 QEM.1
  Top Layer w0.5: REM.2@76.31,82.17 QEM.1@76.31,86.38
NetQIND_2: QIND.2 RINDB.2 | length 4.9
  Top Layer w0.5: QIND.2 132.375,44.375 132.94,43.81 RINDB.2
NetQMUX1_2: QMUX1.2 RMUX1.2 | length 3.4
  Top Layer w0.3: RMUX1.2 QMUX1.2
NetQMUX2_2: QMUX2.2 RMUX2.2 | length 3.4
  Top Layer w0.3: RMUX2.2 QMUX2.2
NetQMUX3_2: QMUX3.2 RMUX3.2 | length 3.4
  Top Layer w0.3: RMUX3.2 QMUX3.2
NetQMUX4_2: QMUX4.2 RMUX4.2 | length 3.4
  Top Layer w0.3: RMUX4.2 QMUX4.2
NetQMUX5_2: QMUX5.2 RMUX5.2 | length 3.4
  Top Layer w0.3: RMUX5.2 QMUX5.2
NetQMUX6_2: QMUX6.2 RMUX6.2 | length 3.4
  Top Layer w0.3: RMUX6.2 QMUX6.2
NetQMUX7_2: QMUX7.2 RMUX7.2 | length 3.4
  Top Layer w0.3: RMUX7.2 QMUX7.2
NetQMUX8_2: QMUX8.2 RMUX8.2 | length 3.4
  Top Layer w0.3: RMUX8.2 QMUX8.2
NetQMUX9_2: QMUX9.2 RMUX9.2 | length 3.4
  Top Layer w0.3: RMUX9.2 QMUX9.2
NetQMUX10_2: QMUX10.2 RMUX10.2 | length 3.4
  Top Layer w0.3: RMUX10.2 QMUX10.2
NetQMUX11_2: QMUX11.2 RMUX11.2 | length 3.4
  Top Layer w0.3: RMUX11.2 QMUX11.2
NetQMUX12_2: QMUX12.2 RMUX12.2 | length 3.4
  Top Layer w0.3: RMUX12.2 QMUX12.2
NetQMUX13_2: QMUX13.2 RMUX13.2 | length 3.6
  Top Layer w0.3: RMUX13.2 QMUX13.2
NetQPO_2: QPO.2 RPOB.2 | length 9.3
  Top Layer w0.5: RPOB.2 122.685,59.56 123.75,60.625 127.625,60.625 128.25,60 QPO.2
NetQSH_2: QSH.2 RSHB.1 | length 3.2
  Top Layer w0.3: RSHB.1 QSH.2
NetRINDB_1: RINDB.1 UINV.6 | length 21.3
  Top Layer w0.3: RINDB.1 140.56,44.06 143.25,46.75 156,46.75 156.705,46.045 UINV.6
NetRMUX1_1: RMUX1.1 UMUX.1 | length 32.9
  Top Layer w0.3: UMUX.1 82.204,50.394 RMUX1.1
NetRMUX2_1: RMUX2.1 UMUX.2 | length 30.8
  Top Layer w0.3: UMUX.2 56.408,51.408 56.75,51.75 78.31,51.75 RMUX2.1
NetRMUX3_1: RMUX3.1 UMUX.3 | length 27.4
  Top Layer w0.3: UMUX.3 54.144,50.394 56.25,52.5 71.74,52.5 76.43,57.19 RMUX3.1
NetRMUX4_1: RMUX4.1 UMUX.4 | length 24.9
  Top Layer w0.3: UMUX.4@51.328,50.578 UMUX.4 54.184,53.25 66.99,53.25 70.75,57.01 73.07,57.01 RMUX4.1
NetRMUX5_1: RMUX5.1 UMUX.5 | length 22.3
  Top Layer w0.3: UMUX.5@48.788,50.788 UMUX.5 48.948,50.394 52.446,53.892 62.632,53.892 ; 62.74,54 65.93,57.19 RMUX5.1
NetRMUX6_1: RMUX6.1 UMUX.6 | length 19.4
  Top Layer w0.3: UMUX.6 46.248,50.498 50.196,54.446 57.686,54.446 60.43,57.19 RMUX6.1
NetRMUX7_1: RMUX7.1 UMUX.7 | length 16.8
  Top Layer w0.3: UMUX.7@43.894,50.394 UMUX.7 48.314,55 53.24,55 55.43,57.19 RMUX7.1
NetRMUX8_1: RMUX8.1 UMUX.8 | length 14
  Top Layer w0.3: UMUX.8 45.774,55 47.49,55 49.75,57.26 52.18,57.26 RMUX8.1
NetRMUX9_1: RMUX9.1 UMUX.9 | length 11.8
  Top Layer w0.3: UMUX.9@38.628,50.878 UMUX.9 38.644,50.394 45.44,57.19 RMUX9.1 RMUX9.1@46.93,57.26
NetRMUX10_1: RMUX10.1 UMUX.10 | length 9.1
  Top Layer w0.3: UMUX.10 36.088,50.588 41.75,56.25 RMUX10.1
NetRMUX11_1: RMUX11.1 UMUX.11 | length 8
  Top Layer w0.3: UMUX.11 33.548,50.798 36.5,53.75 RMUX11.1
NetRMUX12_1: RMUX12.1 UMUX.13 | length 23.6
  Top Layer w0.3: UMUX.13 31.008,43.982 29.25,45.74 29.25,55.19 RMUX12.1
NetRMUX13_1: RMUX13.1 UMUX.14 | length 66.7
  Top Layer w0.3: 45,43 50.25,48.25 RMUX13.1
  Top Layer w0.5: UMUX.14 33.548,39.798 36.75,43 45,43
NetRSHB_2: RSHB.2 USH.9 | length 18.4
  Top Layer w0.3: RSHB.2 153.375,56.93 153.375,62.87 154.005,63.5 160.255,63.5 162.27,65.515 USH.9
NetUBUFF1_9: UBUFF1.9
NetUBUFF1_11: UBUFF1.11
NetUBUFF1_12: UBUFF1.12 UMUX.20 | length 51
  Top Layer w0.3: UMUX.20 48.788,38.038 58,47.25 87.75,47.25 89.39,45.61 UBUFF1.12
NetUBUFF1_14: UBUFF1.14 UMUX.21 | length 43.4
  Top Layer w0.3: UMUX.21 51.328,39.578 58.25,46.5 83,46.5 84.31,45.19 UBUFF1.14
NetUBUFF1_16: UBUFF1.16 UMUX.22 | length 36
  Top Layer w0.3: UMUX.22 53.868,41.118 58.5,45.75 78.5,45.75 79.23,45.02 UBUFF1.16
NetUBUFF1_18: UBUFF1.18 UMUX.23 | length 28.1
  Top Layer w0.3: UMUX.23 56.408,42.658 58.75,45 73.25,45 74.15,44.1 UBUFF1.18
NetUBUFF2_2: UBUFF2.2
NetUBUFF2_4: UBUFF2.4
NetUBUFF2_7: UBUFF2.7 UINV.3 | length 8.1
  Top Layer w0.3: UBUFF2.7@144,39.75 UBUFF2.7 144.19,40.315 145.75,41.875 148.625,41.875 149.085,42.335 UINV.3
NetUBUFF2_8: UBUFF2.8
NetUBUFF2_12: UBUFF2.12
NetUBUFF2_16: UBUFF2.16
NetUBUFF2_18: UBUFF2.18
NetUINV_4: UINV.4 USH.1 | length 40.4
  Top Layer w0.3: USH.1 144.49,58.51 144.875,58.125 144.875,54.375 146.5,52.75 147.5,52.75 147.875,52.375 147.875,48.375 148.875,47.375 156.875,47.375 158,46.25 158,42.375 157.5,41.875 156.5,41.875 155.5,42.875 155.5,45.25 154.625,46.125 152.625,46.125 151.625,45.125 UINV.4
"PIC1 CLK": "CON DRVX.6" UBUFF1.7 | length 38.8
  Top Layer w0.3: UBUFF1.7 84.31,37.06 86.213,38.963 91.663,38.963 94.7,42 94.7,60.5 96.325,62.125 99.55,62.125 99.425,62
"PIC1 OUT": "CON DRVX.4" LPT.32 | length 49.7
  Top Layer w0.3: 104.63,62.125 104.63,60.88 103.88,60.13 103.88,56.505 97.304,49.929 97.304,46.321 99.375,44.25 109.875,44.25 112.625,47 114.875,47 115.5,46.375 115.5,42.875 114.78,42.155 LPT.32 ; LPT.32@114.214,37.286 LPT.32@115.286,37.286
"PIC2 CLK": PICY.6 UBUFF1.5 | length 86.7
  Top Layer w0.3: UBUFF1.5 79.23,36.48 80.696,37.946 81.696,37.946 83.267,39.517 91.392,39.517 94.125,42.25 94.125,66.925 95.05,67.85 106.4,67.85 108,69.45 108,73.625 113,78.625 113,85.75 113.55,86.3 117.05,86.3 117.875,87.125 117.875,88.75 116.515,90.11 PICY.6@115.605,90.11
"PIC2 OUT": LPT.13 pad.12@119.875,69.375 pad.14 PICY.8 | length 42.9
  Top Layer w0.3: PICY.8 116.495,85.005 117.75,83.75 117.75,73.625 119.875,71.5 pad.12@119.875,69.375 ; LPT.13 118.53,47.095 117.75,47.875 117.75,61.375 pad.14
"PIC3 CLK": PICZ.6 UBUFF1.3 | length 75.7
  Top Layer w0.3: UBUFF1.3 74.15,36.275 77,39.125 81.125,39.125 82.625,40.625 84.75,40.625 85.625,41.5 85.625,43.5 86.125,44 87.625,44 88.125,43.5 88.125,41.125 88.75,40.5 90,40.5 90.75,41.25 90.75,44.25 93.5,47 93.5,69.75 93.5,71.125 87,77.625 87,83.625 89.274,85.899 PICZ.6
"PIC3 OUT": LPT.12 pad.10 pad.11 PICZ.8 | length 73.5
  Top Layer w0.3: PICZ.8@90.092,80.533 PICZ.8 90.556,80.819 92.25,79.125 92.25,76.375 96.5,72.125 pad.10 ; pad.11 104.7,65.3 105.875,64.125 105.875,60.375 105.125,59.625 105.125,56.625 98.125,49.625 98.125,46.5 99.821,44.804 109.304,44.804 112.375,47.875 115.75,47.875 117,46.625 117,41.875 116.03,40.905 LPT.12
"PICX DATA": "CON DRVX.5" UBUFF2.14 | length 74.7
  Top Layer w0.3: 102.09,62.125 102.09,56.09 96.75,50.75 96.75,46.029 99.154,43.625 109.375,43.625 112.25,40.75 112.25,39.25 113.5,38 113.5,36 115.5,34 133.75,34 134.25,34.5 142.75,34.5 144.19,33.06 UBUFF2.14
"PICYZ DATA": UBUFF2.5 UINV.1 | length 14.5
  Top Layer w0.3: UINV.1 144.005,45.13 144.875,46 149.375,46 150.375,45 150.375,40.665 UBUFF2.5
PWR-OK: "CON ATX.8" DPO.1 LPT.10 pad.1@96.154,37.154 pad.2 | length 184.8
  Top Layer w0.3: pad.1@96.154,37.154 96.154,51.529 97.895,53.27 DPO.1 ; 96.154,45.721 99,42.875 109.125,42.875 111.03,40.97 LPT.10
  Top Layer w0.5: 38.819,97.25 38.819,94.319 37.55,93.05 32.9,93.05 23.9,84.05 23.9,33.4 29.85,27.45 73.05,27.45 73.5,27 pad.2
STEPY: "CON DRVY.4" PICY.10 | length 10.3
  Top Layer w0.3: PICY.10@123.225,82.49 123.225,81.025 126.63,77.37 126.63,73.5
STEPZ: "CON DRVZ.4" PICZ.10 | length 13.4
  Top Layer w0.5: PICZ.10 97.712,77.788 98.5,77 102.375,77 106.755,72.62 106.755,70.875
UP/DOWNY: "CON DRVY.5" PICY.11 | length 15
  Top Layer w0.3: PICY.11@122.655,85.03 123.225,85.03 PICY.11@123.225,84.525 ; PICY.11 122.505,85.005 121.25,83.75 121.25,78.25 124.09,75.41 124.09,73.5
UP/DOWNZ: "CON DRVZ.5" PICZ.11 | length 17.2
  Top Layer w0.3: PICZ.11@97.712,80.538 PICZ.11 97.069,80.819 95.75,79.5 95.75,77.5 97.125,76.125 101,76.125 104.215,72.91 104.215,70.875
VDD: "CON ATX.4" "CON ATX.6" "CON ATX.19" "CON ATX.20" "CON DRVX.2" "CON DRVY.2" "CON DRVZ.2" CMUX.1 CSH.2 CVDD.1 CZ1.2 pad.0@138.125,69 pad.1@131.71,69 PICZ.14 QMUX1.1 QMUX2.1 QMUX3.1 QMUX4.1 QMUX5.1 QMUX6.1 QMUX7.1 QMUX8.1 QMUX9.1 QMUX10.1 QMUX11.1 QMUX12.1 QMUX13.1 RBP1.2 RBP2.2 RBP3.2 RBP4.2 RBP5.2 RBP6.2 RBP7.2 RBP8.2 RHZ.2 RINDL.2 RLASERL.2 RLDR1.2 RLDR2.2 RMCLRZ.2 RSHP.2 RVSB1.1 RVSB2.1 UINV.14 UMUX.24 USH.16 | length 779.3
  Top Layer w0.3: RLASERL.2@77.995,104.335 RMCLRZ.2 86.165,104.915 87,105.75 87,110.25 ; 81.875,110.125 81.875,107.25 82.625,106.5 83.7,106.5 84.5,107.3 84.5,110.125 85.125,110.75 86.5,110.75 87,110.25 ; 92,102.5 92,109.875 91.625,110.25 87,110.25 ; 95.54,91.535 96.255,92.25 100.375,92.25 102.375,90.25 ; RHZ.2@109.6,80.835 RHZ.2
  Top Layer w0.5: 29.75,62 28.75,63 28.75,65.5 29.98,66.73 QMUX12.1 ; 30.2,102.425 30.2,110.105 RVSB2.1 RVSB1.1 ; 34,62.25 34,65.75 35.23,66.98 QMUX11.1 ; 39,62 39,65.5 40.48,66.98 QMUX10.1 ; 44.5,62 44.5,65.75 45.73,66.98 QMUX9.1 ; 47.264,97.25 47.264,94.836 51.65,90.45 51.65,83.4 48.25,80 29.75,80 26.875,77.125 26.875,34.875 31.625,30.125 58.125,30.125 59.15,31.15 CMUX.1 58.948,32.452 UMUX.24 ; 49.5,62 49.5,65.5 50.98,66.98 QMUX8.1 ; 54.75,62 54.75,65.5 56.23,66.98 QMUX7.1 ; 60.25,62 60.25,66 61.48,67.23 QMUX6.1 ; 65.5,62 65.5,65.75 66.73,66.98 QMUX5.1 ; 70.75,62 70.75,65.75 71.98,66.98 QMUX4.1 ; 75.75,62 75.75,65.5 77.23,66.98 QMUX3.1 ; 81.25,62 81.25,65.75 82.48,66.98 QMUX2.1 ; 81.875,110.125 80.625,111.375 61.925,111.375 57.85,107.3 57.85,99.392 55.708,97.25 53.108,99.85 50.75,99.85 49.3,101.3 49.3,108.1 55.625,114.425 55.625,114.625 133.625,114.625 137.363,110.887 137.363,80.363 131.71,74.71 131.71,67.085 130.875,66.25 117.5,66.25 116.375,67.375 116.375,71.875 115,73.25 113,73.25 111.835,72.085 111.835,65.585 109.71,63.46 109.71,59.71 103.25,53.25 QMUX13.1 ; 85.5,62 86.75,63.25 86.75,65.75 87.73,66.73 QMUX1.1 ; 92,102.5 93.625,100.875 100.61,100.875 101.12,100.365 103.035,100.365 103.75,99.65 103.75,94.75 104.875,93.625 104.875,91.375 103.75,90.25 102.375,90.25 ; 95.54,91.535 95.54,89.025 96.126,88.439 97.686,88.439 97.699,88.426 102.375,83.75 CZ1.2 104.35,82.525 106.125,80.75 RHZ.2 ; RINDL.2 132.75,54.25 138.13,59.63 138.13,64.375 139.03,65.275 CSH.2 140.63,66.875 ; 138.125,64.38 pad.0@138.125,69 ; 138.13,60.125 141.38,56.875 RSHP.2 142.19,54.31 144.005,52.495 UINV.14 ; 140.625,66.875 140.63,66.875 ; USH.16 141.69,67.935 ; RBP8.2 RBP1.2 140.25,105.231 140.25,69.375 141.69,67.935 ; 140.63,66.875 141.69,67.935
  Top Layer w0.75: 29.75,62 90,62 91.75,63.75 91.75,70.5 83.375,78.875 71.675,78.875 68.5,82.05 ; 55.708,97.25 55.708,93.592 58.05,91.25 58.05,86.55 62.55,82.05 68.5,82.05 ; CVDD.1 68.5,82.05
VSB: "CON ATX.9" C1.2 CBUFF1.1 CBUFF2.2 CVDD1.1 pad.4 pad.5 PICY.14 RHY.2 RMCLRY.2 RPOL.2 RPWROFF.2 UBUFF1.20 UBUFF2.20 | length 500.4
  Top Layer w0.3: pad.5 110.75,108.625 111.5,109.375 118.605,109.375 120.99,106.99 ; RMCLRY.2 120.99,106.99 ; RPWROFF.2 128.745,84.99 129.915,86.16 129.915,87.9 ; RHY.2@134.085,87.9 129.915,87.9 ; 120.99,106.99 119.375,105.375 119.375,96.11 121.245,94.24 122.835,92.65 126.265,92.65 C1.2 127.515,90.3 129.915,87.9
  Top Layer w0.5: 34.597,97.25 36.597,99.25 39.7,99.25 40.95,98 40.95,93.85 35.05,87.95 CVDD1.1 33.15,86.35 24.8,78 24.8,33.85 30.3,28.35 62.475,28.35 63.375,29.25 65.875,31.75 66,31.875 66,39.75 65.6,40.15 CBUFF1.1 64,41.75 64.81,42.56 UBUFF1.20 ; pad.4@109.75,117.875 134.008,117.875 142.11,109.773 ; RPOL.2 136.31,70.81 139.375,73.875 139.375,107.004 144.121,111.75 163.375,111.75 164.375,110.75 164.375,72.5 165.75,71.125 165.75,61.125 167.625,59.25 167.625,34.75 164.725,31.85 CBUFF2.2 164.41,31.94 UBUFF2.20
  Top Layer w0.75: 34.597,97.25 34.597,95.297 33.7,94.4 28.5,94.4 27.6,95.3 27.6,113.25 31.55,117.2 62.35,117.2 63.7,118.55 65.45,118.55 66.85,117.15 109.775,117.15 pad.4
pads on no net: "CON ATX.1" "CON ATX.2" "CON ATX.11" "CON ATX.12" "CON ATX.18" LPT1.1 LPT1.2 LPT1.3 LPT1.4 LPT1.5 LPT1.6 LPT1.7 LPT1.8 LPT1.9 LPT1.10 LPT1.11 LPT1.12 LPT1.13 LPT1.14 LPT1.18 LPT1.30 LPT1.31 LPT1.32 LPT1.33 LPT1.35 LPT1.36 LPT.18 LPT.35 LPT_1.1 LPT_1.2 LPT_1.3 LPT_1.4 LPT_1.5 LPT_1.6 LPT_1.7 LPT_1.8 LPT_1.9 LPT_1.10 LPT_1.11 LPT_1.12 LPT_1.13 LPT_1.14 LPT_1.18 LPT_1.30 LPT_1.31 LPT_1.32 LPT_1.33 LPT_1.35 LPT_1.36 PICY.1 PICY.2 PICY.3 PICY.9 PICZ.3 PICZ.9 UINV.8 UINV.9 UINV.10 UINV.11 UINV.12 UINV.13 UMUX.15 UMUX.16 UMUX.17 USH.7 USH.10
copper on no net: | length 553.6
  Top Layer w0.5: 20,26 20,24 22,24 ; 20,122 20,124 22,124 ; 68,138 68,136 70,136 ; 68,166 68,168 70,168 ; 80.932,147.654 81.188,147.654 80.97,147.872 ; 82.22,158.394 82.22,158.702 80.496,160.426 78.972,160.426 77.956,159.41 77.956,144.678 79.48,143.154 81.512,143.154 82.438,144.08 82.438,145.154 ; 83.47,155.894 83.47,147.872 83.688,147.654 ; 84.72,158.394 84.72,159.25 82.528,161.442 78.464,161.442 76.94,159.918 76.94,143.662 78.464,142.138 84.052,142.138 84.938,143.024 84.938,145.154 ; 85.97,155.894 85.97,147.872 86.188,147.654 ; 87.22,158.394 87.22,159.798 84.56,162.458 77.956,162.458 75.924,160.426 75.924,143.154 77.956,141.122 86.084,141.122 87.438,142.476 87.438,145.154 ; 88.47,155.894 88.47,147.872 88.688,147.654 ; 89.72,158.394 89.72,160.854 87.1,163.474 77.448,163.474 74.908,160.934 74.908,142.646 77.448,140.106 88.116,140.106 89.938,141.928 89.938,145.154 ; 90.97,155.894 90.97,147.872 91.188,147.654 ; 92.22,158.394 92.22,162.498 94.212,164.49 107.42,164.49 110.976,160.934 110.976,142.138 107.928,139.09 97.26,139.09 92.438,143.912 92.438,145.154 ; 93.47,155.894 93.47,147.872 93.688,147.654 ; 94.72,158.394 94.72,161.442 96.752,163.474 106.912,163.474 109.96,160.426 109.96,142.646 107.42,140.106 97.768,140.106 94.938,142.936 94.938,145.154 ; 95.97,155.894 95.97,147.872 96.188,147.654 ; 97.22,158.394 97.22,160.894 98.784,162.458 106.404,162.458 108.944,159.918 108.944,143.154 106.912,141.122 100.308,141.122 97.438,143.992 97.438,145.154 ; 98.47,155.894 98.47,147.872 98.688,147.654 ; 99.72,158.394 99.72,159.33 101.832,161.442 105.896,161.442 107.928,159.41 107.928,143.662 106.404,142.138 100.816,142.138 99.938,143.016 99.938,145.154 ; 100.97,155.894 100.97,147.872 101.188,147.654 ; 102.22,158.394 102.22,159.798 102.848,160.426 105.388,160.426 106.912,158.902 106.912,144.17 105.896,143.154 102.848,143.154 102.438,143.564 102.438,145.154 ; 103.47,155.894 103.47,147.872 103.688,147.654 ; 104.72,158.394 105.896,157.218 105.896,146.112 104.938,145.154 ; 114,136 116,136 116,138 ; 114,168 116,168 116,166 ; 170,24 172,24 172,26 ; 170,124 172,124 172,122
  Top Layer w1: 79.72,158.394 79.72,145.372 79.938,145.154 ; 79.76,155.894 80.97,155.894 80.97,147.872 ; 79.792,147.654 81.188,147.654

## Other copper
Top Layer:
  text "la circuito de grupo tres" at 40.1,60.5 h1.52 r180

## Text inside footprints (layer, text, board x,y; h text height)
"Q LASER": Top Overlay "1" at 97.771,105.954 h1.5 r270; Top Overlay "3" at 100.217,105.954 h1.5 r270
QEM: Top Overlay "3" at 80.91,82.225 h1.5; Top Overlay "2" at 78.37,82.225 h1.5; Top Overlay "1" at 76.08,82.225 h1.5
QIND: Top Overlay "1" at 131.921,42.396 h1.5; Top Overlay "3" at 131.921,44.842 h1.5
QMUX1: Top Overlay "1" at 87.021,65.829 h1.5 r270; Top Overlay "3" at 89.467,65.829 h1.5 r270
QMUX2: Top Overlay "1" at 81.771,65.829 h1.5 r270; Top Overlay "3" at 84.217,65.829 h1.5 r270
QMUX3: Top Overlay "1" at 76.521,65.829 h1.5 r270; Top Overlay "3" at 78.967,65.829 h1.5 r270
QMUX4: Top Overlay "1" at 71.271,65.829 h1.5 r270; Top Overlay "3" at 73.717,65.829 h1.5 r270
QMUX5: Top Overlay "1" at 66.021,65.829 h1.5 r270; Top Overlay "3" at 68.467,65.829 h1.5 r270
QMUX6: Top Overlay "1" at 60.771,65.829 h1.5 r270; Top Overlay "3" at 63.217,65.829 h1.5 r270
QMUX7: Top Overlay "1" at 55.521,65.829 h1.5 r270; Top Overlay "3" at 57.967,65.829 h1.5 r270
QMUX8: Top Overlay "1" at 50.271,65.829 h1.5 r270; Top Overlay "3" at 52.717,65.829 h1.5 r270
QMUX9: Top Overlay "1" at 45.021,65.829 h1.5 r270; Top Overlay "3" at 47.467,65.829 h1.5 r270
QMUX10: Top Overlay "1" at 39.771,65.829 h1.5 r270; Top Overlay "3" at 42.217,65.829 h1.5 r270
QMUX11: Top Overlay "1" at 34.521,65.829 h1.5 r270; Top Overlay "3" at 36.967,65.829 h1.5 r270
QMUX12: Top Overlay "1" at 29.271,65.829 h1.5 r270; Top Overlay "3" at 31.717,65.829 h1.5 r270
QMUX13: Top Overlay "1" at 100.829,50.229 h1.5 r180; Top Overlay "3" at 100.829,47.783 h1.5 r180
QPO: Top Overlay "3" at 128.717,55.954 h1.5 r270; Top Overlay "1" at 126.271,55.954 h1.5 r270
QSH: Top Overlay "1" at 161.709,58.854 h1.5 r180; Top Overlay "3" at 161.709,56.408 h1.5 r180